# Altium PCB NEpic_small.PcbDoc (part 1 of 2)
Units mil, origin at the board's own origin, x right, y up, seen from the top; angles counter-clockwise.
Board outline 1373 x 1857 mil, 4 copper layers (Top Layer, GND, VCC, Bottom Layer); 29 components, 61 nets, 188 pads, 110 vias.
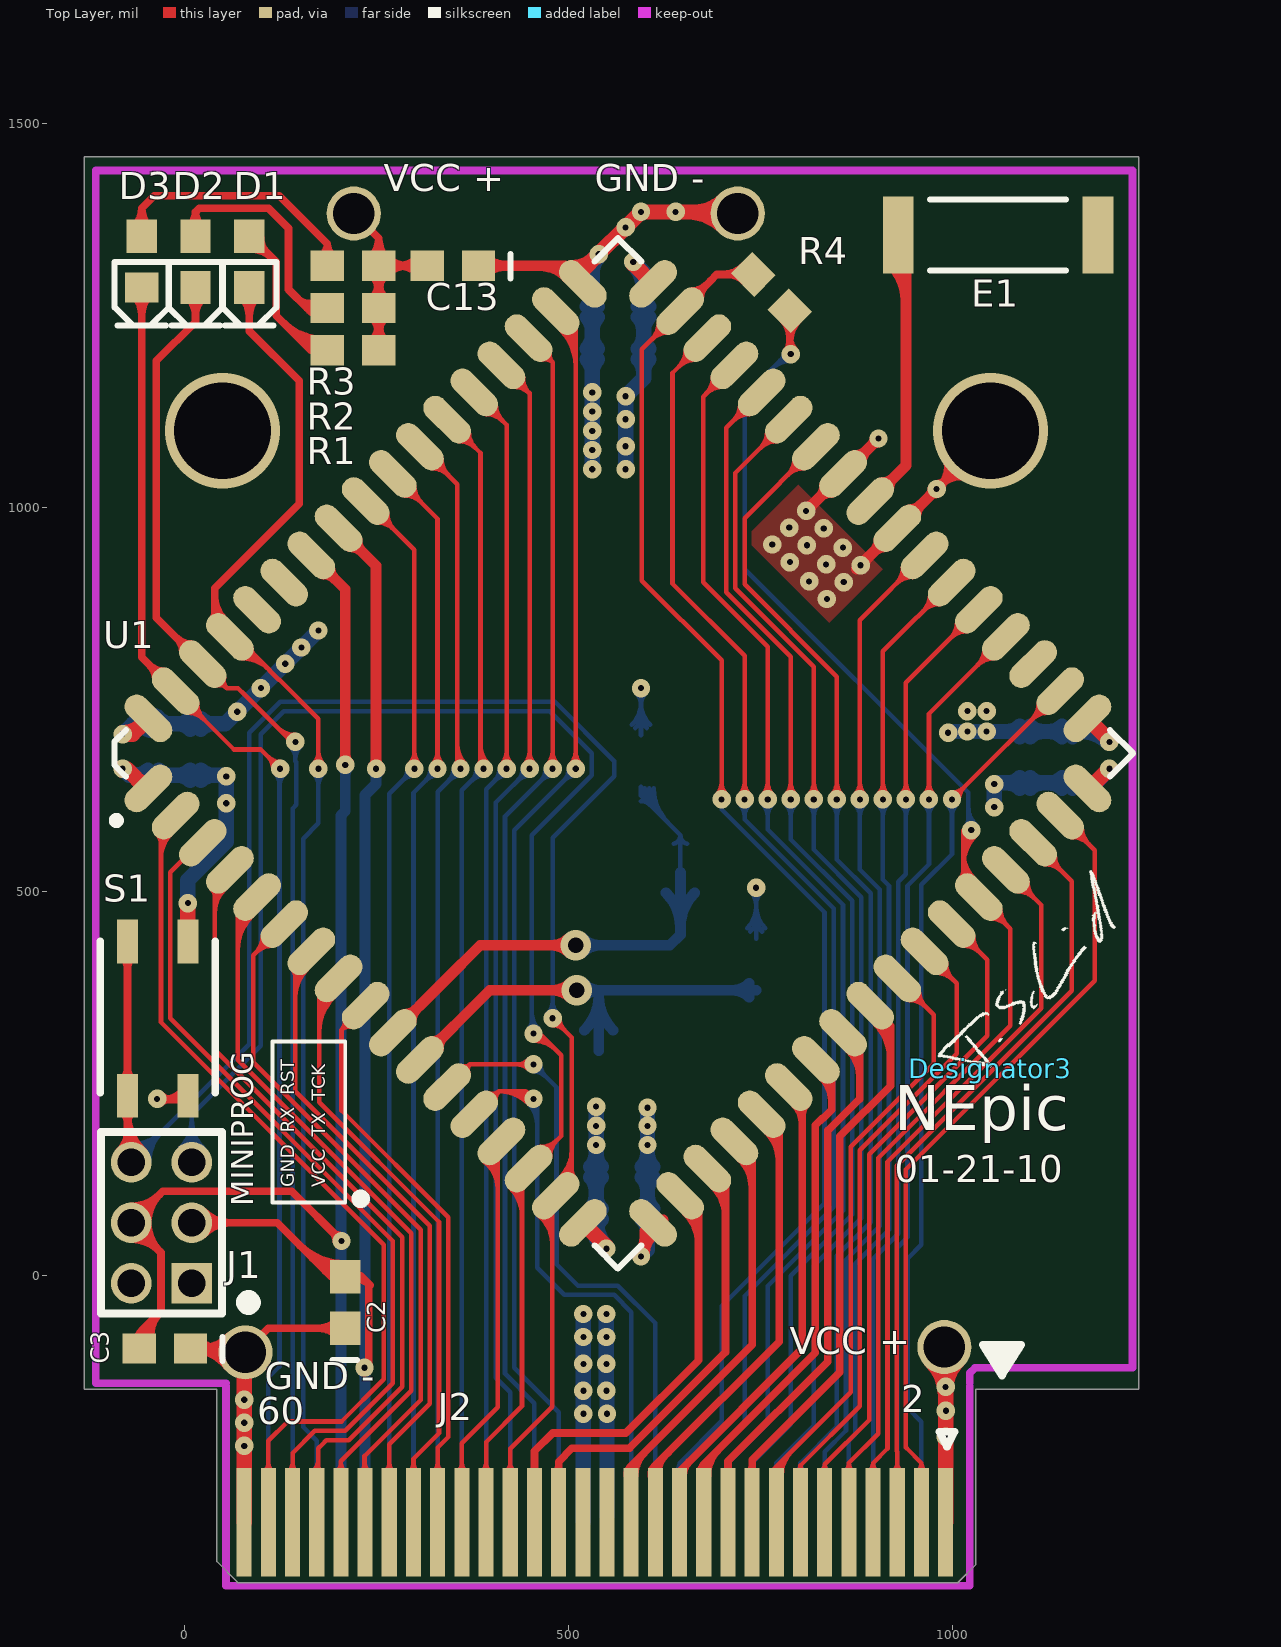
[diagram p0: Top Layer view]
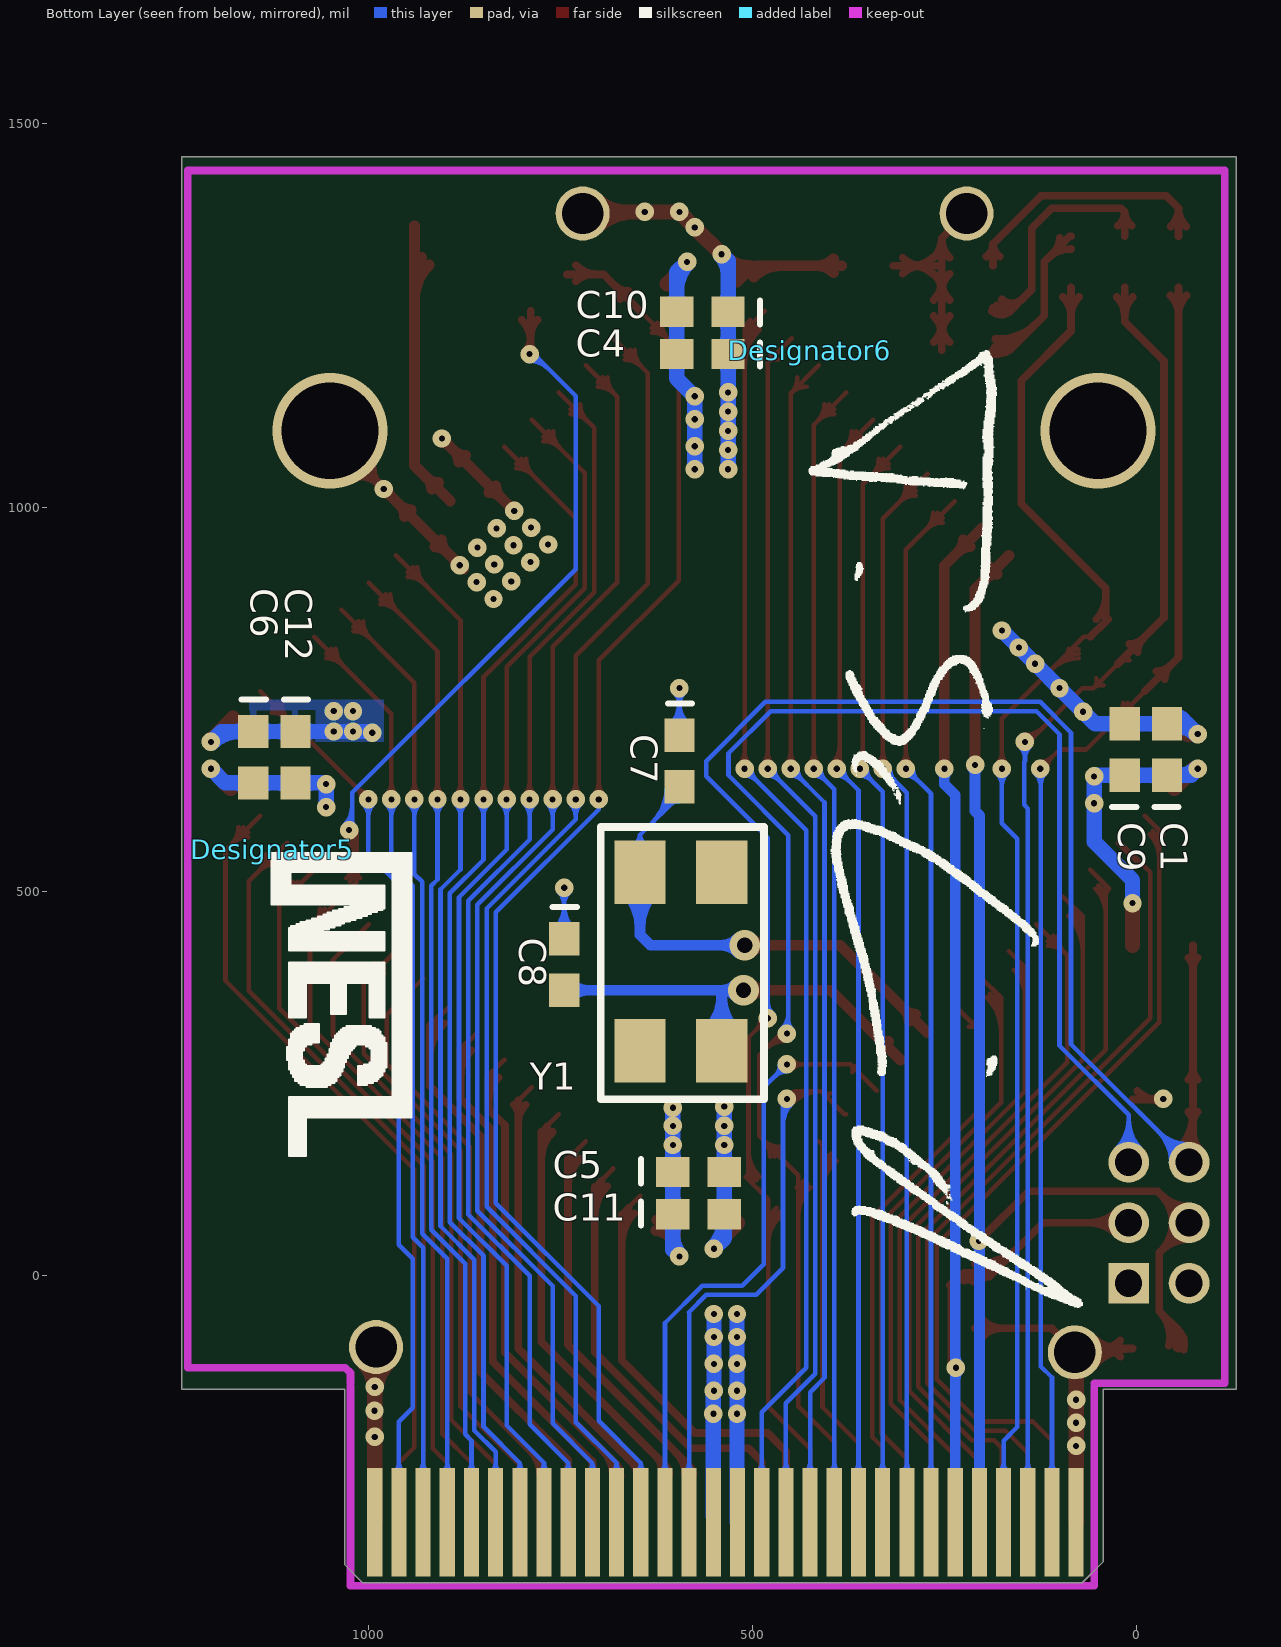
[diagram p1: Bottom Layer view, seen from below]
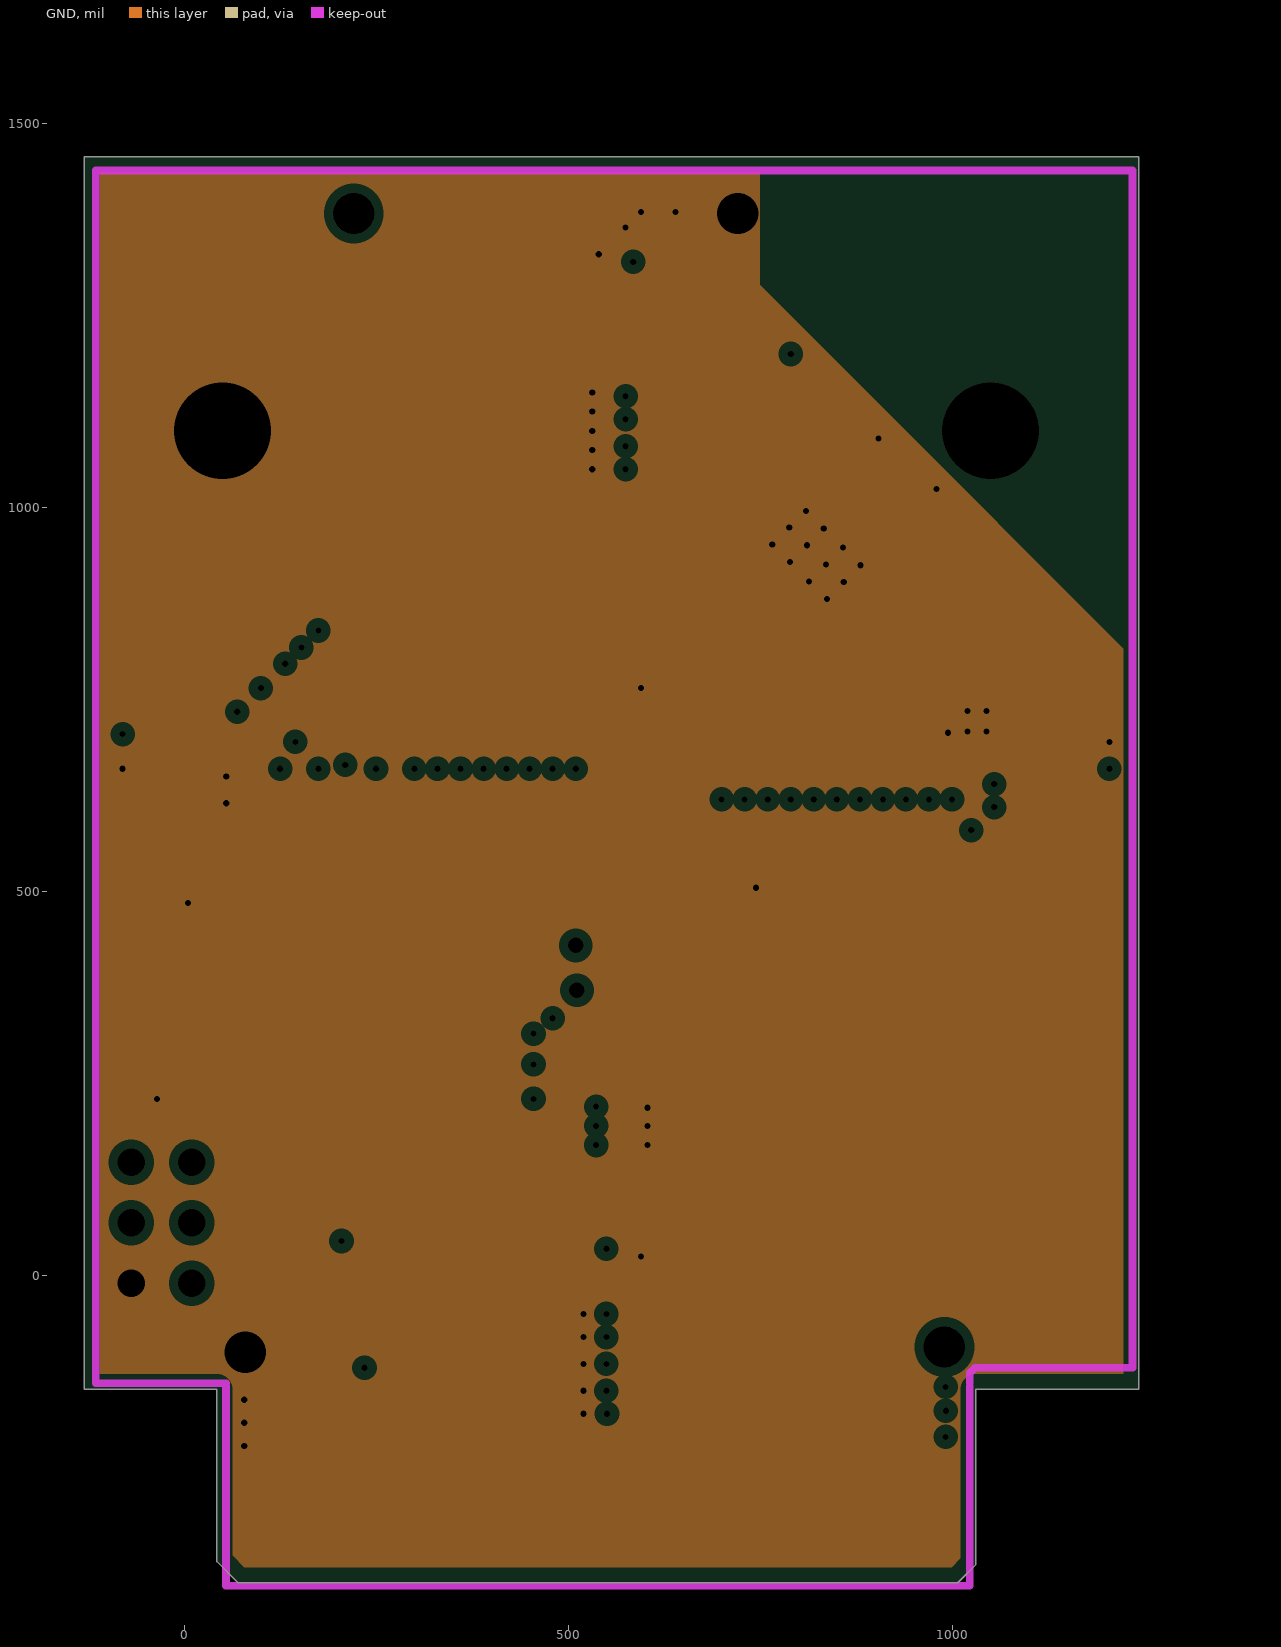
[diagram p2: GND, clearances drawn from the general rule]
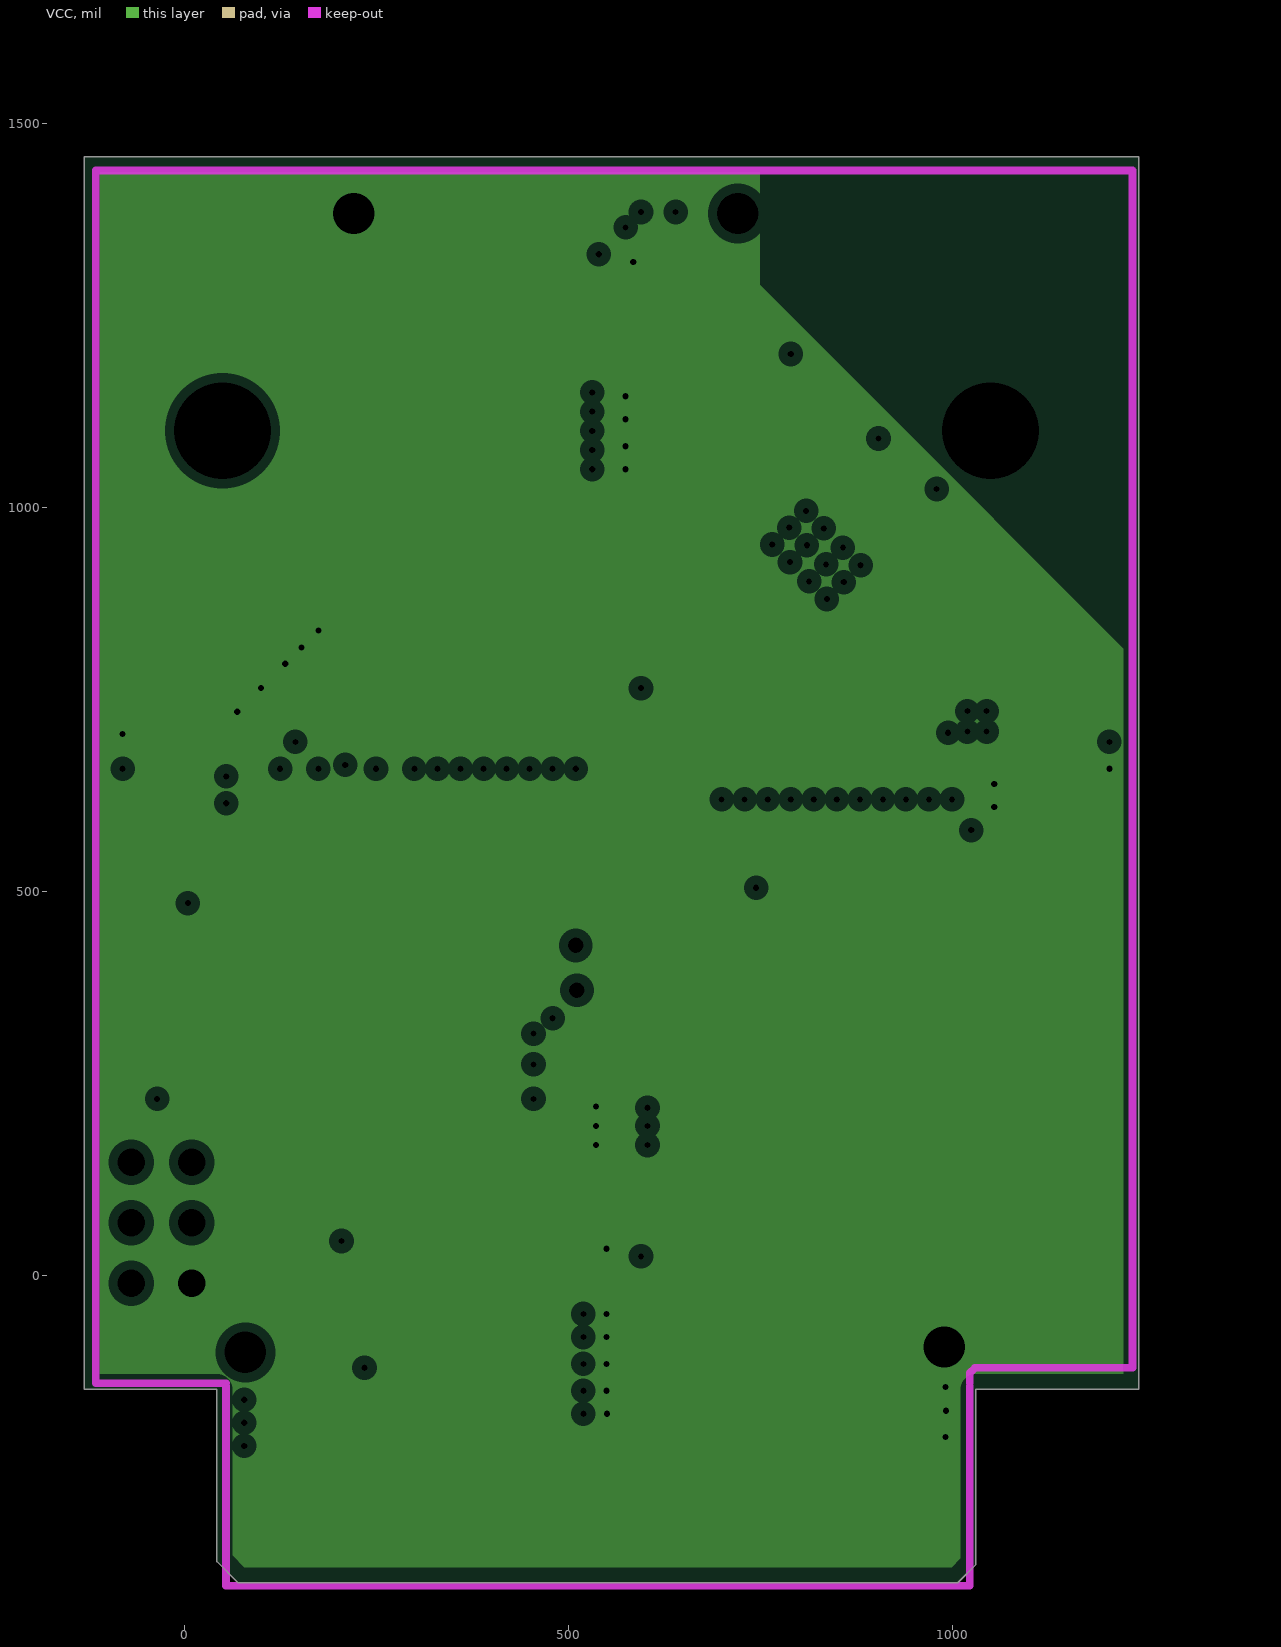
[diagram p3: VCC, clearances drawn from the general rule]

## Layer stack, top to bottom
Top Layer: signal copper 1.4
Dielectric: core 12.6, FR-4, Dk 4.8
GND: plane copper 1.4, net GND
Dielectric: prepreg 12.6, FR-4, Dk 4.8
VCC: plane copper 1.4, net VCC
Dielectric: core 12.6, FR-4, Dk 4.8
Bottom Layer: signal copper 1.4

## Board outline
42.87,-372.44 42.87,-148.03 -130,-148.03 -130,1457 1243,1457 1243,-148.03 1031.06,-148.03 1031.06,-376.38 1007.44,-400 70.43,-400

## Design rules (kind name [scope] priority, off if disabled: settings)
Clearance "Clearance~Sunstone Circuits" [All] p1: gap=6 // Sunstone Circuits Minimum Clearance Rule (MLB~4&6 Layer Designs)
HoleSize "HoleSize~Sunstone Circuits" [All] p1: absolutevalues=TRUE maxlimit=251 minlimit=8 maxpercent=80.000 minpercent=20.000 // Sunstone Circuits Hole Size Rule (MLB~4&6 Layer Designs)
HoleSize Testpoint [All] p2: absolutevalues=TRUE maxlimit=100 minlimit=1 maxpercent=80.000 minpercent=20.000
HoleSize TestPointUsage [All] p3: absolutevalues=TRUE maxlimit=100 minlimit=1 maxpercent=80.000 minpercent=20.000
MinimumAnnularRing "MinimumAnnularRing~Sunstone Circuits" [All] p1: minimumring=7 // Sunstone Circuits Minimum Annular Ring (MLB~4&6 Layer Designs)
PlaneClearance "PlaneClearance~Sunstone Circuits" [All] p1: clearance=12 // Sunstone Circuits Power Plane Clearance Rule (MLB~4&6 Layer Designs)
PlaneConnect [isVia] p1: planeconnectstyle=Direct reliefexpansion=20 reliefentries=4 reliefconductorwidth=10 reliefairgap=10
PlaneConnect "PlaneConnect~Sunstone Circuits" [All] p2: planeconnectstyle=Relief reliefexpansion=10 reliefentries=4 reliefconductorwidth=8 reliefairgap=10 // Sunstone Circuits Power Plane Connect Rule (MLB~4&6 Layer Designs)
PolygonConnect [isVia] p1: connectstyle=Direct reliefconductorwidth=10 reliefentries=4 polygonreliefangle="90 Angle"
PolygonConnect "PolygonConnect~Sunstone Circuits" [All] p2: connectstyle=Relief reliefconductorwidth=8 reliefentries=4 polygonreliefangle="90 Angle" // Sunstone Circuits Polygon Connect Style (MLB~4&6 Layer Designs)
RoutingVias "RoutingVias~Sunstone Circuits" [All] p1: holewidth=8 width=24 viastyle="Through Hole" minholewidth=8 minwidth=24 maxholewidth=20 maxwidth=40 // Sunstone Circuits Routing Vias Rule (MLB~4&6 Layer Designs)
ShortCircuit "ShortCircuit~Sunstone Circuits" [All] p1: allowed=FALSE // Sunstone Circuits Short Circuit Rule~Do Not Allow (MLB~4&6 Layer Designs)
SilkscreenOverComponentPads [All] p1: minsilkscreentomaskgap=10
SolderMaskExpansion "SolderMaskExpansion~Sunstone Circuits" [All] p1: expansion=3 // Sunstone Circuits Solder Mask Expansion Rule (MLB~4&6 Layer Designs)
ViasUnderSMD "ViasUnderSMD~Sunstone Circuits" [All] p1: allowed=FALSE // Sunstone Circuits Vias Under SMD~Do Not Allow (MLB~4&6 Layer Designs)
Width "Width~Sunstone Circuits" [All] p1: maxlimit=100 minlimit=6 preferedwidth=10 // Sunstone Circuits Minimum Width Rule (MLB~4&6 Layer Designs)
23 further rules are at their usual default settings.

## Components (designator, comment, footprint, x,y, rotation, side; value= is the part's Value field where it differs from the comment)
C1 "Cap" CC1608-0603 -40,685 r90 bottom
C2 "Cap" CC1608-0603 210,-35 r90 top
C3 "Cap" CC1608-0603 -25,-95 r180 top
C4 "Cap" CC1608-0603 565,1200 r0 bottom
C5 "Cap" CC1608-0603 570,135 r180 bottom
C6 "Cap" CC1608-0603 1150,675 r270 bottom
C7 "Cap" CC1608-0603 595,670 r270 bottom
C8 "Cap" CC1608-0603 745,405 r270 bottom
C9 "Cap" CC1608-0603 15,685 r90 bottom
C10 "Cap" CC1608-0603 565,1255 r0 bottom
C11 "Cap" CC1608-0603 570,80 r180 bottom
C12 "Cap" CC1608-0603 1095,675 r270 bottom
C13 "Cap" CC1608-0603 350,1315 r180 top
D1 "LITEON/LED RED" LITEON/LED/0603#1 85,1320 r270 top
D2 "LITEON/LED GREEN" LITEON/LED/0603#1 15,1320 r270 top
D3 "LITEON/LED BLUE" LITEON/LED/0603#2 -55,1320 r270 top
Designator3 "Comment" Signature_Thomas_Small 1050,270 r45 top
Designator5 "Comment" NESL_Logo 1125,555 r270 bottom
Designator6 "Comment" Signature_Thomas 425,1205 r270 bottom
E1 "ANT/ATN-2.4" ANT/ANT-2.45-CHPCT-ND 1060,1355 r0 top
J1 "Epic MiniProg" "6-pin 2mm" 10,-10 r90 top
J2 "SAMTEC/MEC8-130" SAMTEC/MEC8L-130-CARD 1035,-400 r180 top locked
R1 "Res3" CR1608-0603 220,1205 r180 top
R2 "Res3" CR1608-0603 220,1260 r180 top
R3 "Res3" CR1608-0603 220,1315 r180 top
R4 "Res3" CR1608-0603 765,1280 r315 top
S1 "PANASONIC/EVQP2" PANASONIC/EVQP2 5,435 r270 top
U1 "Epic Mote Compact" EPIC-Footprint 565,680 r45 top locked
Y1 "CRYSTAL_0" FOX/FQ7050B 540,525 r270 bottom

## Footprints (in the part's own frame and the unit in brackets; to place one, negate y for a bottom-side part, rotate by r counter-clockwise, add the part's x,y. Pads: shape width x height; smd on the part's side, far side on the other; paste and mask are expansions set on the pad)
"6-pin 2mm" [mm] "6-pin 2mm spacing header"
  rect 1.346x1.346 hole 0.9 mask+0: 1(0,0)
  round 1.346 hole 0.9 mask+0: 2(0,2) 3(2,0) 4(2,2) 5(4,0) 6(4,2)
  silkscreen extent -1,-2.04 5,3
ANT/ANT-2.45-CHPCT-ND [mil] "ANT 2.4 GHZ SMD Chip Antenna"
  rect 40x100 smd mask+0: 1(-130,0) ""(130,0)
  silkscreen extent -89,-46 89,46, body extent -128,-43 128,43, height 39
CC1608-0603 [mm] "Chip Capacitor; Body 1.6 x 0.8 mm (LxW typ)"
  rect 1.1x1 smd mask+0: 1(-0.85,0) 2(0.85,0)
  silkscreen extent -1.91,-0.38 -1.91,0.42
CR1608-0603 [mm] "Chip Resistor; Body 1.6 x 0.8 mm (LxW typ)"
  rect 1.1x1 smd mask+0: 1(-0.85,0) 2(0.85,0)
EPIC-Footprint [mm] "LCC, 68-Pins, Body 24.1x24.1mm (max), Pitch 1.27mm, IPC Medium Density"
  oval 1.9x0.8 smd mask+0: 1(-11.8,10.16) 2(-11.8,8.89) 3(-11.8,7.62) 4(-11.8,6.35) 5(-11.8,5.08) 6(-11.8,3.81) 7(-11.8,2.54) 8(-11.8,1.27) 9(-11.8,0) 10(-11.8,-1.27) 11(-11.8,-2.54) 12(-11.8,-3.81) 13(-11.8,-5.08) 14(-11.8,-6.35) 15(-11.8,-7.62) 16(-11.8,-8.89) 17(-11.8,-10.16) 35(11.8,-10.16) 36(11.8,-8.89) 37(11.8,-7.62) 38(11.8,-6.35) 39(11.8,-5.08) 40(11.8,-3.81) 41(11.8,-2.54) 42(11.8,-1.27) 43(11.8,0) 44(11.8,1.27) 45(11.8,2.54) 46(11.8,3.81) 47(11.8,5.08) 48(11.8,6.35) 49(11.8,7.62) 50(11.8,8.89) 51(11.8,10.16)
  oval 0.8x1.9 smd mask+0: 18(-10.16,-11.8) 19(-8.89,-11.8) 20(-7.62,-11.8) 21(-6.35,-11.8) 22(-5.08,-11.8) 23(-3.81,-11.8) 24(-2.54,-11.8) 25(-1.27,-11.8) 26(0,-11.8) 27(1.27,-11.8) 28(2.54,-11.8) 29(3.81,-11.8) 30(5.08,-11.8) 31(6.35,-11.8) 32(7.62,-11.8) 33(8.89,-11.8) 34(10.16,-11.8) 52(10.16,11.8) 53(8.89,11.8) 54(7.62,11.8) 55(6.35,11.8) 56(5.08,11.8) 57(3.81,11.8) 58(2.54,11.8) 59(1.27,11.8) 60(0,11.8) 61(-1.27,11.8) 62(-2.54,11.8) 63(-3.81,11.8) 64(-5.08,11.8) 65(-6.35,11.8) 66(-7.62,11.8) 67(-8.89,11.8) 68(-10.16,11.8)
  silkscreen extent -13.42,-12.05 12.05,12.05, body extent -12.07,-12.07 12.07,12.07, height 2.54
FOX/FQ7050B [mm] "FOX FQ7050B Crystal Oscillaotr Footprint"
  rect 2.1x1.7 smd: 1(0,-2.7) 2(5.9,0) ""(0,0) ""(5.9,-2.7)
  silkscreen extent -1.5,-4 7.5,1.4
LITEON/LED/0603#1 [mm] "Chip LED; 0603; Body 1.6 x 0.8 mm (LxW typ)"
  rect 1.1x1 smd mask+0: 1(-0.85,0) 2(0.85,0)
  silkscreen extent 0,-0.9 2.1,0.9
LITEON/LED/0603#2 [mm] "Chip LED; 0603; Body 1.6 x 0.8 mm (LxW typ)"
  rect 1.1x1 smd mask+0: 1(-0.85,0)
  rect 1x1.1 smd mask+0: 2(0.85,0)
  silkscreen extent 0,-0.9 2.1,0.9
NESL_Logo [mil]
  silkscreen extent 5,-1 400,181
PANASONIC/EVQP2 [mm] "Panasonic EVQP2 SMD Light Touch Switch 4.7mmx3.5mm"
  rect 1.45x0.7 smd mask+0: 1(5.1,0) 2(5.1,-2) 3(0,0) 4(0,-2)
  silkscreen extent 0,-2.9 5,0.9
SAMTEC/MEC8L-130-CARD [mm] "CARD Edge Connector for MEC8L-130, 30 positions, 60 pins"
  rect 0.5x3.6 smd far side: 1(1.1,-2) 3(1.9,-2) 5(2.7,-2) 7(3.5,-2) 9(4.3,-2) 11(5.1,-2) 13(5.9,-2) 15(6.7,-2) 17(7.5,-2) 19(8.3,-2) 21(9.1,-2) 23(9.9,-2) 25(10.7,-2) 27(11.5,-2) 29(12.3,-2) 31(13.1,-2) 33(13.9,-2) 35(14.7,-2) 37(15.5,-2) 39(16.3,-2) 41(17.1,-2) 43(17.9,-2) 45(18.7,-2) 47(19.5,-2) 49(20.3,-2) 51(21.1,-2) 53(21.9,-2) 55(22.7,-2) 57(23.5,-2) 59(24.3,-2)
  rect 0.5x3.6 smd: 2(1.1,-2) 4(1.9,-2) 6(2.7,-2) 8(3.5,-2) 10(4.3,-2) 12(5.1,-2) 14(5.9,-2) 16(6.7,-2) 18(7.5,-2) 20(8.3,-2) 22(9.1,-2) 24(9.9,-2) 26(10.7,-2) 28(11.5,-2) 30(12.3,-2) 32(13.1,-2) 34(13.9,-2) 36(14.7,-2) 38(15.5,-2) 40(16.3,-2) 42(17.1,-2) 44(17.9,-2) 46(18.7,-2) 48(19.5,-2) 50(20.3,-2) 52(21.1,-2) 54(21.9,-2) 56(22.7,-2) 58(23.5,-2) 60(24.3,-2)
  Keep-Out Layer lines w0.254: 24.9,-6.5 24.9,0.1 0.3,0.1 0.3,-6.5
  silkscreen extent 0.8,-5 1.3,-4.5
Signature_Thomas [mil] "My Signature"
  silkscreen extent 0,-1 1247,355
Signature_Thomas_Small [mil] "smaller signature"
  silkscreen extent -37,1 276,90

## Part data
C1 C2 C3 C4 C5 C6 C7 C8 C9 C10 C11 C12 C13: "Capacitor (Semiconductor SIM Model)"
D1: "LiteOn Red LED 0605 Footprint"
D2: "LiteOn Green LED 0605 Footprint"
D3: "LiteOn Blue LED 0605 Footprint"
E1: library part Antenna, "ANT/ANT-2.4 Chip Antenna"
J2: library part SAMTEC/HSEC8/50, "0.8mm Pitch 60 pin Card Edge Socket"
R1 R2 R3 R4: "Resistor"

## Free pads (board coordinates)
  round 70.5 hole 54: 0(80,-100) 0(221,1383) 0(721,1383) 0(990,-93)

## Via types
v1: diameter 24, hole 8, Top Layer to Bottom Layer, tented both sides, 106 vias
v2: diameter 40, hole 20, Top Layer to Bottom Layer, tented both sides, 2 vias
v3: diameter 150, hole 126, Top Layer to Bottom Layer, tented both sides, 2 vias

## Nets (pads, with @x,y where several pads share a name; then routed paths per layer and width w, separated by ;. In a path a pad name is that pad's centre, name@x,y a point inside that pad or via, vN(x,y) a via of type N, cw(c..) or ccw(c..) an arc to the next point about the centre after c; other vN are vias at no path point)
ADC0: J2.36 U1.19 | length 666.1
  Top Layer w6: U1.19@646.01,104.01 U1.19@670,80.03
  Top Layer w10: J2.36@452.84,-256.81 ccw(c444.57,-248.55) 456.26,-248.55 ccw(c467.95,-248.55) J2.36@459.68,-256.81 ; J2.36@456.26,-321.26 456.26,-228.74 480,-205 575,-205 670,-110 U1.19@670,80.03 ; U1.19@653.72,81.1 cw(c614.43,41.81) 670,41.81 ; U1.19@660.79,88.17 cw(c638.57,65.95) 670,65.95
ADC1: J2.34 U1.20 | length 689.1
  Top Layer w6: U1.20@681.37,139.37 U1.20@705,115.74
  Top Layer w10: J2.34@484.33,-256.81 ccw(c476.07,-248.55) 487.76,-248.55 ccw(c499.45,-248.55) J2.34@491.18,-256.81 ; J2.34@487.76,-321.26 487.76,-242.24 505,-225 580,-225 705,-100 U1.20@705,115.74 ; U1.20@689.08,116.46 cw(c650.64,78.02) 705,78.02 ; U1.20@696.15,123.53 cw(c674.78,102.16) 705,102.16
ADC2: J2.28 U1.21 | length 700.6
  Top Layer w6: U1.21@716.72,174.72 U1.21@740,151.45
  Top Layer w10: J2.28@577.09,-260.24 cw(c594.77,-260.24) 582.26,-247.74 ; J2.28@578.82,-256.81 ccw(c570.55,-248.55) 582.24,-248.55 ccw(c593.93,-248.55) J2.28@585.67,-256.81 ; J2.28@582.24,-321.26 582.24,-247.76 ; J2.28@587.09,-260.24 cw(c628.91,-260.24) 599.34,-230.66 ; U1.21@724.43,151.81 cw(c686.85,114.23) 740,114.23 ; U1.21@731.5,158.88 cw(c710.99,138.37) 740,138.37 ; U1.21@740,151.45 740,-90 582.24,-247.76
ADC3: J2.26 U1.22 | length 736.2
  Top Layer w6: U1.22@752.08,210.08 U1.22@775,187.16
  Top Layer w10: J2.26@608.7,-261.33 cw(c622.43,-258.35) 612.5,-248.42 ; J2.26@610.32,-256.81 ccw(c602.05,-248.55) 613.74,-248.55 ccw(c625.43,-248.55) J2.26@617.16,-256.81 ; J2.26@613.74,-321.26 613.74,-247.17 625.46,-235.46 ; J2.26@618.47,-259.21 cw(c643.73,-253.73) 625.45,-235.46 ; 630.91,-230 625.46,-235.46 ; U1.22@759.79,187.17 cw(c723.07,150.45) 775,150.45 ; U1.22@766.86,194.24 cw(c747.21,174.59) 775,174.59 ; U1.22@775,187.16 775,-85.91 625.46,-235.46
ADC4: J2.24 U1.23 | length 700.5
  Top Layer w6: J2.24@645.24,-321.26 J2.24@645.24,-254.76 ; U1.23@787.43,245.44 U1.23@805,227.87
  Top Layer w10: J2.24@645.24,-254.76 805,-95 U1.23@805,227.87 ; J2.24@650.08,-260.24 cw(c674.98,-260.24) 657.37,-242.63 ; U1.23@795.14,222.52 cw(c771.35,198.73) 805,198.73 ; 805,209.62 cw(c823.24,209.62) U1.23@810.34,222.52
ADC5: J2.22 U1.24 | length 803.1
  Top Layer w6: U1.24@822.79,280.79 U1.24@843.49,260.09
  Top Layer w10: J2.22@671.57,-260.24 cw(c693.75,-260.24) 678.07,-244.56 ; J2.22@673.31,-256.81 ccw(c665.04,-248.55) 676.73,-248.55 ccw(c688.42,-248.55) J2.22@680.16,-256.81 ; J2.22@676.73,-321.26 676.73,-245.9 822,-100.63 822,195.63 831.37,205 832.37,205 843.49,216.11 U1.24@843.49,260.09 ; J2.22@681.57,-260.24 cw(c727.89,-260.24) 695.14,-227.49 ; U1.24@830.5,257.88 cw(c799.15,226.53) 843.49,226.53 ; U1.24@837.57,264.95 cw(c823.29,250.67) 843.49,250.67
ADC6/DAC0: J2.20 U1.25 | length 793.5
  Top Layer w6: 838,189 839,189 ; U1.25@858.14,316.15 U1.25@880,294.29
  Top Layer w10: J2.20@704.8,-256.81 ccw(c696.54,-248.55) 708.23,-248.55 ccw(c719.92,-248.55) J2.20@711.65,-256.81 ; J2.20@708.23,-321.26 708.23,-241.77 838,-112 838,-83.37 838,189 ; 839,189 880,230 880,240 U1.25@880,294.29 ; U1.25@865.86,293.23 cw(c831.71,259.09) 880,259.09 ; U1.25@872.93,300.31 cw(c855.85,283.23) 880,283.23
ADC7/DAC1: J2.18 U1.26 | length 867.9
  Top Layer w6: U1.26@893.5,351.5 920,325 ; U1.26@915.7,325.46 cw(c917.56,322.56) 920,325 ; U1.26@919.54,329.3 ccw(c922.44,327.44) 920,325
  Top Layer w10: J2.18@736.3,-256.81 ccw(c728.03,-248.55) 739.72,-248.55 ccw(c751.42,-248.55) J2.18@743.15,-256.81 ; J2.18@739.72,-321.26 739.72,-240 749.72,-230 854,-125.72 854,-76.75 854,181.37 920,247.37 920,325 ; U1.26@901.21,328.59 cw(c855.84,283.23) 920,283.23 ; U1.26@908.28,335.66 cw(c879.99,307.37) 920,307.37
ATEST1: J2.15 U1.46 | length 1745.9
  Top Layer w6: U1.46@759.37,1099.25 cw(c728.6,1099.25) 750.36,1077.49 cw(c772.12,1055.73) U1.46@772.12,1086.5 ; U1.46@765.37,1099.25 cw(c749.08,1099.25) 760.6,1087.73 cw(c772.12,1076.21) U1.46@772.12,1092.5 ; U1.46@787.43,1114.56 718,1045.13 718,895.03 820,793.03 v1(820,620) ; v1@813.64,626.36 ccw(c798.27,641.73) 820,641.73 ccw(c841.73,641.73) v1@826.36,626.36
  Bottom Layer w6: J2.15@766.44,-255.34 ccw(c755.38,-244) 771.22,-244 ; J2.15@771.22,-321.26 771.22,-244 ; J2.15@776,-255.34 cw(c787.06,-244) 771.22,-244 ; v1@813.64,613.64 cw(c798.27,598.27) 820,598.27 cw(c841.73,598.27) v1@826.36,613.64 ; v1(820,620) 820,554.85 882,492.85 882,74.55 820,12.55 820,-195.22 771.22,-244
ATEST2: J2.17 U1.47 | length 1779.6
  Top Layer w6: U1.47@724.02,1134.61 cw(c693.24,1134.61) 715,1112.85 cw(c736.77,1091.08) U1.47@736.77,1121.86 ; U1.47@730.02,1134.61 cw(c713.73,1134.61) 725.25,1123.09 cw(c736.77,1111.57) U1.47@736.77,1127.86 ; U1.47@752.08,1149.92 706,1103.84 706,890.06 790,806.06 v1(790,620) ; v1@783.64,626.36 ccw(c768.27,641.73) 790,641.73 ccw(c811.73,641.73) v1@796.36,626.36
  Bottom Layer w6: J2.17@734.95,-255.34 ccw(c723.88,-244) 739.72,-244 ; J2.17@739.72,-321.26 739.72,-244 ; J2.17@744.5,-255.34 cw(c755.56,-244) 739.72,-244 ; v1@783.64,613.64 cw(c768.27,598.27) 790,598.27 cw(c811.73,598.27) v1@796.36,613.64 ; v1(790,620) 790,567.88 870,487.88 870,79.52 790,-0.48 790,-193.72 739.72,-244
FLASH_CS: J2.3 U1.36 | length 1340.4
  Top Layer w6: v1(1000,620) U1.36@1140.99,761.01 ; v1@1000,629 ccw(c1000,650.67) 1015.32,635.35 ; v1@1009,620 cw(c1030.79,620) 1015.38,635.41 ; U1.36@1112.93,745.7 cw(c1082.15,745.7) 1103.91,723.94 cw(c1125.67,702.18) U1.36@1125.67,732.95 ; U1.36@1118.93,745.7 cw(c1102.64,745.7) 1114.16,734.18 cw(c1125.67,722.66) U1.36@1125.67,738.95
  Bottom Layer w6: J2.3@955.36,-255.4 ccw(c943.68,-243.72) 960.2,-243.72 ccw(c976.72,-243.72) J2.3@965.04,-255.4 ; J2.3@960.2,-321.26 960.2,-190.2 942,-172 942,21.8 960.2,40 960.2,508.99 964,512.79 1000,548.79 v1(1000,620) ; v1@993.64,613.64 cw(c978.27,598.27) 1000,598.27 cw(c1021.73,598.27) v1@1006.36,613.64
FLASH_WP: U1.37
GND: C1.1 C2.1 C3.1 C4.1 C5.1 C6.1 C7.1 C8.1 C9.1 C10.1 C11.1 C12.1 C13.1 J1.2 J2.31 J2.60 pad.0@80,-100 pad.0@721,1383 S1.1 S1.3 U1.1 U1.18 U1.35 U1.42 U1.44 U1.52 | length 4954.2
  Top Layer w6: U1.35@1176.34,725.66 U1.35@1176.34,726.34
  Top Layer w10: v1(-80,660) v1@-75,660 ; U1.1@-49.34,634.34 U1.1@-46.34,634.34 ; v1(-35,230) -34.21,229.21 S1.1@5,229.21 ; v1@-30.05,225.05 cw(c-20,215) -20,229.21 ; v1@-30.05,234.95 ccw(c-16.2,248.8) -16.2,229.21 ; v1@-28.27,229.21 ccw(c-28.27,267.48) S1.1@-1.21,240.42 ; C3.1@19.04,-95 ccw(c19.04,-39.04) pad.0@58.61,-78.61 ; C3.1@20.82,-105.38 cw(c45.89,-130.45) 45.89,-95 cw(c45.89,-59.55) C3.1@20.82,-84.62 ; C3.1@26.28,-95 cw(c26.28,-144.52) pad.0@64.41,-112.92 ; 43.18,-95 ccw(c43.18,-63.18) pad.0@65.68,-85.68 ; pad.0@56.71,-119.3 ccw(c5,-162.16) 5,-95 73.31,-95 78.31,-100 109.84,-68.46 C2.1@210,-68.46 ; C2.1@199.62,-78.85 ccw(c174.55,-103.92) 174.55,-68.46 ccw(c174.55,-33.01) C2.1@199.62,-58.08 ; U1.52@495.69,1315 U1.52@519.34,1291.34 U1.52@519.34,1309.34 ; pad.0@719,1385 pad.0@721,1383 ; v1(980,1024.29) 1050,1094.29 v3@1050,1104 ; v1@980,1031.29 ccw(c980,1048.19) 991.95,1036.24 ccw(c1003.9,1024.29) v1@987,1024.29 ; v3@989.78,1068.31 cw(c962.11,1051.9) 984.86,1029.15 cw(c1012.56,1001.45) v3@1025.99,1038.25 ; 993.96,1038.25 ccw(c973.54,1058.68) v3@998.39,1073.41 ; 995.94,1040.23 cw(c1018.49,1017.69) v3@1029.42,1047.64 ; v1(1205,695) v1@1205,697
  Top Layer w14: C13.1@383.46,1315 U1.52@495.69,1315 ; C13.1@394.4,1306.03 cw(c416.06,1284.38) 416.06,1315 cw(c416.06,1345.62) C13.1@394.4,1323.97 ; 462.76,1315 cw(c462.76,1265.38) U1.52@497.85,1300.47 ; v1@591.46,28.54 ccw(c570.86,49.14) 600,49.14 ; v1(595,25) 600,25 600,58 U1.18@610.66,68.66 ; v1@600,30.41 cw(c628.31,30.41) U1.18@625.43,58.57 ; 600,45.91 cw(c626.73,45.91) U1.18@624.01,72.5 ; U1.18@605.98,68.66 U1.18@610.66,68.66 ; U1.18@613.67,68.66 611.34,68.66 U1.18@610.66,68.66 ; v1(810,995.71) U1.44@858.14,1043.85 v1(904.29,1090) ; v1@810,1000.71 ccw(c810,1012.78) 818.54,1004.25 ccw(c827.07,995.71) v1@815,995.71 ; U1.44@834.08,1028.54 cw(c812.97,1028.54) 827.9,1013.61 cw(c842.83,998.68) U1.44@842.83,1019.79 ; U1.44@873.46,1067.91 ccw(c873.46,1089.03) 888.39,1074.1 ccw(c903.32,1059.17) U1.44@882.2,1059.17 ; v1@875.71,920 U1.42@928.85,973.14 v1(980,1024.29) ; v1@886,925 cw(c898.77,925) 889.74,934.03 ; v1@899.29,1090 cw(c887.22,1090) 895.75,1081.46 cw(c904.29,1072.93) v1@904.29,1085 ; U1.42@904.79,957.83 cw(c883.68,957.83) 898.61,942.9 cw(c913.54,927.97) U1.42@913.54,949.08 ; U1.42@944.17,997.2 ccw(c944.17,1018.32) 959.1,1003.39 ccw(c974.03,988.46) U1.42@952.91,988.46 ; v1@975,1024.29 cw(c962.93,1024.29) 971.46,1015.75 cw(c980,1007.22) v1@980,1019.29
  Top Layer w20: v1@-80,658 cw(c-80,641.1) -68.05,653.05 ; v1@-75,660 U1.1@-49.34,634.34 ; -61.28,646.28 ccw(c-46.34,661.22) U1.1@-46.34,640.09 ; S1.3@5,430 v1(5,485) ; J2.60@78.31,-321.26 v1(78.31,-221.69) v1(78.31,-191.69) v1(78.31,-161.69) pad.0@78.31,-100 ; U1.52@504.03,1312.4 ccw(c504.03,1356.75) v1@535.39,1325.39 ; U1.52@519.34,1309.34 v1(540,1330) v1(575,1365) v1(595,1385) v1(640,1385) pad.0@719,1385 ; 655.21,1385 cw(c655.21,1317.21) pad.0@703.15,1365.15 ; 664.87,1385 ccw(c664.87,1439.13) pad.0@703.15,1400.85 ; U1.35@1176.34,725.66 v1@1205,697
  Bottom Layer w6: C7.1@583.2,717.23 ccw(c554.72,745.71) 595,745.71 ccw(c635.28,745.71) C7.1@606.8,717.23 ; C7.1@587.44,712.99 ccw(c569.2,731.23) 595,731.23 ccw(c620.8,731.23) C7.1@602.56,712.99 ; v1@588.64,758.64 cw(c573.27,743.27) 595,743.27 cw(c616.73,743.27) v1@601.36,758.64 ; C7.1@595,703.46 v1(595,765) ; C8.1@733.2,452.23 ccw(c704.72,480.71) 745,480.71 ccw(c785.28,480.71) C8.1@756.8,452.23 ; C8.1@737.44,447.99 ccw(c719.2,466.23) 745,466.23 ccw(c770.8,466.23) C8.1@752.56,447.99 ; v1@738.64,498.64 cw(c723.27,483.27) 745,483.27 cw(c766.73,483.27) v1@751.36,498.64 ; C8.1@745,438.46 v1(745,505)
  Bottom Layer w10: v1(995,706.93) v1@996.54,708.46
  Bottom Layer w14: J2.31@519.25,-321.26 J2.31@520,-320.51 ; v1(595,25) v1@603.46,33.46
  Bottom Layer w20: v1(-80,660) -71.54,651.54 C9.1@15,651.54 53.46,651.54 v1(55,650) v1(55,615) 55,565 5,515 v1(5,485) ; v1@-78.59,661.41 ccw(c-54.74,685.26) C1.1@-54.74,651.54 ; C1.1@-46.85,644.69 ccw(c-63.38,628.15) -63.38,651.54 ccw(c-63.38,674.92) C1.1@-46.85,658.38 ; C1.1@-33.15,644.69 cw(c-16.62,628.15) -16.62,651.54 cw(c-16.62,674.92) C1.1@-33.15,658.38 ; C9.1@8.15,644.69 ccw(c-8.38,628.15) -8.38,651.54 ccw(c-8.38,674.92) C9.1@8.15,658.38 ; C9.1@21.85,644.69 cw(c38.38,628.15) 38.38,651.54 cw(c38.38,674.92) C9.1@21.85,658.38 ; J2.31@520,-320.51 v1(520,-50) ; C4.1@524.69,1193.15 cw(c508.15,1176.62) 531.54,1176.62 cw(c554.92,1176.62) C4.1@538.38,1193.15 ; C4.1@524.69,1206.85 ccw(c508.15,1223.38) 531.54,1223.38 ccw(c554.92,1223.38) C4.1@538.38,1206.85 ; C10.1@524.69,1248.15 cw(c508.15,1231.62) 531.54,1231.62 cw(c554.92,1231.62) C10.1@538.38,1248.15 ; C10.1@524.69,1261.85 ccw(c508.15,1278.38) 531.54,1278.38 ccw(c554.92,1278.38) C10.1@538.38,1261.85 ; v1(531.54,1050) 531.54,1321.54 v1(540,1330) ; 531.54,1304.74 cw(c565.26,1304.74) v1@541.41,1328.59 ; v1@593.59,26.41 ccw(c569.74,50.26) 603.46,50.26 ; C11.1@596.62,73.15 cw(c580.08,56.62) 603.46,56.62 cw(c626.85,56.62) C11.1@610.31,73.15 ; C11.1@596.62,86.85 ccw(c580.08,103.38) 603.46,103.38 ccw(c626.85,103.38) C11.1@610.31,86.85 ; C5.1@596.62,128.15 cw(c580.08,111.62) 603.46,111.62 cw(c626.85,111.62) C5.1@610.31,128.15 ; C5.1@596.62,141.85 ccw(c580.08,158.38) 603.46,158.38 ccw(c626.85,158.38) C5.1@610.31,141.85 ; v1@603.46,33.46 C5.1@603.46,135 v1(603.46,218.46) ; v1@996.54,708.46 C12.1@1095,708.46 C6.1@1150,708.46 1191.54,708.46 v1(1205,695) ; C12.1@1088.15,701.62 ccw(c1071.62,685.08) 1071.62,708.46 ccw(c1071.62,731.85) C12.1@1088.15,715.31 ; C12.1@1101.85,701.62 cw(c1118.38,685.08) 1118.38,708.46 cw(c1118.38,731.85) C12.1@1101.85,715.31 ; C6.1@1143.15,701.62 ccw(c1126.62,685.08) 1126.62,708.46 ccw(c1126.62,731.85) C6.1@1143.15,715.31 ; C6.1@1156.85,701.62 cw(c1173.38,685.08) 1173.38,708.46 cw(c1173.38,731.85) C6.1@1156.85,715.31 ; C6.1@1167.67,708.46 cw(c1167.67,657.67) v1@1203.59,693.59
  other v1: 520,-180 520,-150 520,-115 520,-80 603.46,170 603.46,195 1020,708.46 1045,708.46 1020,735 1045,735 837,881 859,903 814,904 881,925 836,926 789,929 858,948 811,951 766,952 833,973 788,974 531.54,1075 531.54,1100 531.54,1125 531.54,1150
  other v3: 50,1100 1050,1100
I2C0/SPI0: J2.33 U1.53 | length 1882.5
  Top Layer w6: U1.53@483.99,1255.99 510,1229.98 510,1110 v1(510,660) ; U1.53@490.29,1231.66 cw(c442.7,1184.07) 510,1184.07 ; U1.53@494.53,1235.9 cw(c457.18,1198.55) 510,1198.55 ; U1.53@498.77,1240.15 cw(c471.67,1213.04) 510,1213.04 ; U1.53@503.02,1244.39 cw(c486.15,1227.53) 510,1227.53 ; v1@503.64,666.36 ccw(c488.27,681.73) 510,681.73 ccw(c531.73,681.73) v1@516.36,666.36
  Bottom Layer w6: J2.33@482.92,-255.4 ccw(c471.24,-243.72) 487.76,-243.72 ccw(c504.28,-243.72) J2.33@492.59,-255.4 ; J2.33@487.76,-321.26 487.76,-177.76 430,-120 430,37.7 430,580 v1(510,660) ; v1@501,660 cw(c479.27,660) 494.64,644.64 cw(c510,629.27) v1@510,651
LED1: D1.2 J2.53 U1.65 | length 2043.2
  Top Layer w6: U1.65@59.72,831.72 68.28,831.72 110.76,789.24 110.76,788.07 123.07,775.76 124.24,775.76 175,725 v1(175,660) ; U1.65@75.04,803.66 cw(c75.04,752.24) 111.4,788.6 ; U1.65@75.04,809.66 cw(c75.04,772.72) 101.16,798.84 ; U1.65@75.04,815.66 cw(c75.04,793.21) 90.91,809.09 ; U1.65@87.78,816.41 ccw(c97.91,816.41) 90.75,809.25 ; v1@168.64,666.36 ccw(c153.27,681.73) 175,681.73 ccw(c196.73,681.73) v1@181.36,666.36
  Top Layer w10: U1.65@36.81,854.63 ccw(c29.12,862.33) 40,862.33 ; 40,883.63 ccw(c81.01,883.63) U1.65@52.01,854.63 ; U1.65@59.72,831.72 40,851.45 40,895 150,1005 150,1165 85,1230 D1.2@85,1286.54 ; D1.2@74.62,1274.18 cw(c49.55,1249.11) 85,1249.11 cw(c120.45,1249.11) D1.2@95.38,1274.18
  Bottom Layer w6: J2.53@167.96,-255.4 ccw(c156.28,-243.72) 172.8,-243.72 ccw(c189.31,-243.72) J2.53@177.63,-255.4 ; v1@168.64,653.64 cw(c153.27,638.27) 175,638.27 cw(c196.73,638.27) v1@181.36,653.64 ; J2.53@172.8,-321.26 172.8,-214.95 155,-197.15 155,568.94 175,588.94 v1(175,660)
LED2: D2.2 J2.55 U1.66 | length 1968.5
  Top Layer w6: U1.66@8.93,801.07 19.67,801.07 U1.66@24.37,796.37 55.74,765 ; U1.66@42.68,768.67 cw(c45.95,755.21) 55.74,765 ; U1.66@52.07,778.05 ccw(c65.52,774.79) 55.74,765 ; 121.62,713.69 ccw(c145,737.07) v1@145,704 ; 131.86,703.44 ccw(c145,716.59) v1@145,698 ; 132.96,702.34 cw(c125.61,695) v1@136,695 ; v1(145,695) 140.3,695 79,756.3 70.3,765 55.74,765
  Top Layer w10: U1.66@-1.69,811.68 ccw(c-27.64,811.68) -9.29,830.03 ccw(c9.06,848.37) U1.66@9.06,822.43 ; D2.2@4.62,1274.18 cw(c-20.45,1249.11) 15,1249.11 cw(c50.45,1249.11) D2.2@25.38,1274.18 ; D2.2@15,1286.54 15,1242 -36,1191 -36,856.74 U1.66@24.37,796.37
  Bottom Layer w6: J2.55@136.46,-255.4 ccw(c124.78,-243.72) 141.3,-243.72 ccw(c157.82,-243.72) J2.55@146.14,-255.4 ; v1@138.64,688.64 cw(c123.27,673.27) 145,673.27 cw(c166.73,673.27) v1@151.36,688.64 ; J2.55@141.3,-321.26 141.3,608.27 146,612.97 146,668.7 145,669.7 v1(145,695)
LED3: D3.2 J2.57 U1.67 | length 1973.7
  Top Layer w6: U1.67@-10.99,761.01 65.02,685 100,685 v1(125,660) ; U1.67@4.33,732.95 cw(c4.33,702.17) 26.09,723.94 cw(c47.85,745.7) U1.67@17.07,745.7 ; U1.67@4.33,738.95 cw(c4.33,722.66) 15.84,734.18 cw(c27.36,745.7) U1.67@11.07,745.7 ; v1@116,660 ccw(c94.27,660) 109.64,675.36 ccw(c125,690.73) v1@125,669
  Top Layer w10: D3.2@-65.38,1276.15 cw(c-90.45,1251.08) -55,1251.08 cw(c-19.55,1251.08) D3.2@-44.62,1276.15 ; D3.2@-55,1286.54 -55,805.02 U1.67@-10.99,761.01 ; U1.67@-37.05,776.32 ccw(c-62.99,776.32) -44.65,794.67 ccw(c-26.3,813.02) U1.67@-26.3,787.07
  Bottom Layer w6: J2.57@104.96,-255.4 ccw(c93.28,-243.72) 109.8,-243.72 ccw(c126.32,-243.72) J2.57@114.64,-255.4 ; J2.57@109.8,-321.26 109.8,-132.78 124.25,-118.33 124.25,659.25 v1(125,660) ; v1@118.64,653.64 cw(c105.08,640.08) 124.25,640.08 ; 124.25,636.46 cw(c148.54,636.46) v1@131.36,653.64
MISO0: J2.41 U1.57 | length 1651.7
  Top Layer w6: U1.57@342.57,1114.56 386,1071.13 386,664 v1(390,660) ; U1.57@357.88,1086.5 cw(c357.88,1055.73) 379.64,1077.49 cw(c401.4,1099.25) U1.57@370.63,1099.25 ; U1.57@357.88,1092.5 cw(c357.88,1076.21) 369.4,1087.73 cw(c380.92,1099.25) U1.57@364.63,1099.25 ; v1@383.64,666.36 ccw(c377.93,672.07) 386,672.07 ; 386,676.9 ccw(c406.9,676.9) v1@392.12,662.12 ; 386,691.38 ccw(c421.38,691.38) v1@396.36,666.36
  Bottom Layer w6: J2.41@356.93,-255.4 ccw(c345.25,-243.72) 361.77,-243.72 ccw(c378.29,-243.72) J2.41@366.61,-255.4 ; J2.41@361.77,-321.26 361.77,631.77 v1(390,660) ; v1@381,660 cw(c359.27,660) 374.64,644.64 cw(c390,629.27) v1@390,651
MOSI0/SDA: J2.39 U1.56 | length 1667.8
  Top Layer w6: U1.56@377.92,1149.92 418.92,1108.92 420,1107.84 v1(420,660) ; U1.56@393.23,1121.86 cw(c393.23,1091.08) 415,1112.85 cw(c436.76,1134.61) U1.56@405.98,1134.61 ; U1.56@393.23,1127.86 cw(c393.23,1111.57) 404.75,1123.09 cw(c416.27,1134.61) U1.56@399.98,1134.61 ; v1@413.64,666.36 ccw(c398.27,681.73) 420,681.73 ccw(c441.73,681.73) v1@426.36,666.36
  Bottom Layer w6: J2.39@388.43,-255.4 ccw(c376.75,-243.72) 393.27,-243.72 ccw(c409.79,-243.72) J2.39@398.11,-255.4 ; J2.39@393.27,-321.26 393.27,633.27 v1(420,660) ; v1@411,660 cw(c389.27,660) 404.64,644.64 cw(c420,629.27) v1@420,651
NetD1_1: D1.1 R1.2 | length 387.8
  Top Layer w10: D1.1@85,1336.81 cw(c85,1292.9) 116.05,1323.95 ; D1.1@85,1353.46 86.54,1353.46 120,1320 120,1250 165,1205 R1.2@186.54,1205 ; D1.1@99.68,1351.5 ccw(c126.68,1351.5) 107.59,1332.41 ; 129.79,1240.21 ccw(c179.69,1290.12) R1.2@183.73,1219.66 ; 145.56,1224.44 ccw(c181.4,1260.27) R1.2@184.3,1209.68 ; 161.34,1208.66 ccw(c183.11,1230.43) R1.2@184.87,1199.69
NetD2_1: D2.1 R2.2 | length 462.5
  Top Layer w10: D2.1@6.13,1367.13 ccw(c-7.42,1385) 15,1385 ; D2.1@15,1353.46 15,1385 ; D2.1@23.87,1367.13 cw(c37.42,1385) 15,1385 ; 148.28,1271.72 ccw(c161.94,1285.37) R2.2@174.79,1270.96 ; 155.77,1264.23 ccw(c169,1277.46) R2.2@181.45,1263.5 ; 163.26,1256.74 ccw(c176.06,1269.54) R2.2@188.1,1256.03 ; R2.2@171.63,1253.05 ccw(c160,1246.79) 160,1260 ; R2.2@171.63,1266.95 cw(c160,1273.21) 160,1260 ; R2.2@184.64,1260 R2.2@186.54,1260 160,1260 ; 15,1385 20,1390 110,1390 136,1364 136,1284 160,1260
NetD3_1: D3.1 R3.2 | length 449.7
  Top Layer w10: D3.1@-65.19,1366 ccw(c-88.34,1390) -55,1390 ; D3.1@-55,1353.46 -55,1390 ; D3.1@-44.81,1366 cw(c-21.66,1390) -55,1390 ; R3.2@178.02,1326.97 ccw(c166.29,1343.46) 186.54,1343.46 ; R3.2@186.54,1333.46 R3.2@186.54,1315 186.54,1343.46 ; R3.2@195.05,1326.97 cw(c206.78,1343.46) 186.54,1343.46 ; -55,1390 -39,1406 124,1406 186.54,1343.46
NetE1_1: E1.1 U1.43 | length 487.3
  Top Layer w14: U1.43@893.5,1008.5 940,1055 E1.1@940,1367 ; U1.43@908.81,1032.56 ccw(c908.81,1053.68) 923.74,1038.74 ccw(c938.68,1023.81) U1.43@917.56,1023.81 ; E1.1@920.81,1315.81 cw(c874.47,1269.47) 940,1269.47 ; E1.1@930.71,1325.71 cw(c908.27,1303.27) 940,1303.27
ONEWIRE: J2.35 U1.54 | length 1718.9
  Top Layer w6: U1.54@448.63,1220.63 480,1189.26 ; U1.54@466.95,1192.93 cw(c470.21,1179.48) 480,1189.26 ; v1@473.64,666.36 ccw(c458.27,681.73) 480,681.73 ccw(c501.73,681.73) v1@486.36,666.36 ; U1.54@476.33,1202.32 ccw(c489.79,1199.05) 480,1189.26 ; v1(480,660) 480,1130.74 480,1189.26
  Bottom Layer w6: J2.35@451.42,-255.4 ccw(c439.74,-243.72) 456.26,-243.72 ccw(c472.78,-243.72) J2.35@461.1,-255.4 ; J2.35@456.26,-321.26 456.26,-166.26 418,-128 418,598 v1(480,660) ; v1@471,660 cw(c449.27,660) 464.64,644.64 cw(c480,629.27) v1@480,651
P1.2: J2.10 R4.2 U1.30 | length 2317.2
  Top Layer w6: v1(790,1200) v1@790,1202.67 ; J2.10@860.93,-255.34 ccw(c849.87,-244) 865.71,-244 ; J2.10@865.71,-321.26 865.71,-244 ; J2.10@870.49,-255.34 cw(c881.55,-244) 865.71,-244 ; U1.30@1010.59,517.25 ccw(c999.96,527.89) 1015,527.89 ; 1015,534.13 cw(c1070.87,534.13) v1@1031.36,573.64 ; 1015,535.65 ccw(c1047.03,535.65) U1.30@1024.38,513.01 ; 1015,548.62 cw(c1056.38,548.62) v1@1027.12,577.88 ; 1015,550.14 ccw(c1061.51,550.14) U1.30@1028.62,517.25 ; 1015,563.1 cw(c1041.9,563.1) v1@1022.88,582.12 ; v1(1025,580) 1015,580 1015,512.84 U1.30@1034.92,492.92 1076,451.84 1076,325.09 904,153.09 904,-56.03 904,-146.43 904,-166.91 904,-179.94 904,-192.97 904,-205.71 865.71,-244 ; U1.30@1050.23,464.86 cw(c1050.23,434.09) 1071.99,455.85 cw(c1093.76,477.61) U1.30@1062.98,477.61 ; U1.30@1050.23,470.86 cw(c1050.23,454.57) 1061.75,466.09 cw(c1073.27,477.61) U1.30@1056.98,477.61
  Top Layer w10: R4.2@779.67,1244.56 cw(c757.96,1222.85) 788.66,1222.85 ; v1@785.05,1204.95 ccw(c776.33,1213.67) 788.66,1213.67 ; 788.66,1216.13 cw(c828.87,1216.13) R4.2@800.44,1244.56 ; 788.66,1220.13 ccw(c810.13,1220.13) v1@794.95,1204.95 ; R4.2@788.66,1256.34 788.66,1201.34 v1(790,1200)
  Bottom Layer w6: 765.51,1180.85 cw(c790,1156.36) v1@790,1191 ; 775.75,1191.1 cw(c790,1176.85) v1@790,1197 ; 778.42,1193.77 ccw(c772.18,1200) v1@781,1200 ; v1(790,1200) 784.65,1200 730,1145.35 730,920 1021,629 1021,586 1020,585 1030,585 v1(1025,580) ; v1@1018.64,586.36 ccw(c1012.93,592.07) 1021,592.07 ; 1021,596.9 ccw(c1041.9,596.9) v1@1027.12,582.12 ; 1021,611.38 ccw(c1056.38,611.38) v1@1031.36,586.36
P1.5: J2.8 U1.31 | length 1058.3
  Top Layer w6: J2.8@892.43,-255.34 ccw(c881.37,-244) 897.2,-244 ; J2.8@897.2,-321.26 897.2,-244 ; J2.8@901.98,-255.34 cw(c913.04,-244) 897.2,-244 ; U1.31@1070.28,528.28 1116,482.55 1116,348.12 916,148.12 916,-51.06 916,-151.41 916,-171.88 916,-184.91 916,-197.94 916,-210.68 916,-225.2 897.2,-244 ; U1.31@1085.59,500.22 cw(c1085.59,469.44) 1107.35,491.2 cw(c1129.11,512.97) U1.31@1098.34,512.97 ; U1.31@1085.59,506.22 cw(c1085.59,489.93) 1097.11,501.45 cw(c1108.63,512.97) U1.31@1092.34,512.97
P1.6: J2.6 U1.32 | length 1100.4
  Top Layer w6: J2.6@923.86,-255.4 ccw(c912.18,-243.72) 928.7,-243.72 ccw(c945.22,-243.72) J2.6@933.54,-255.4 ; J2.6@928.7,-321.26 928.7,-229.47 928,-228.77 928,-215.65 928,-202.91 928,-189.88 928,-176.85 928,-156.38 928,-46.09 928,143.15 1156,371.15 1156,513.26 U1.32@1105.63,563.63 ; U1.32@1120.94,535.57 cw(c1120.94,504.8) 1142.7,526.56 cw(c1164.47,548.32) U1.32@1133.69,548.32 ; U1.32@1120.94,541.57 cw(c1120.94,525.28) 1132.46,536.8 cw(c1143.98,548.32) U1.32@1127.69,548.32
P1.7: J2.4 U1.33 | length 1148.4
  Top Layer w6: J2.4@955.42,-255.34 ccw(c944.36,-244) 960.2,-244 ; J2.4@960.2,-321.26 960.2,-244 ; J2.4@964.98,-255.34 cw(c976.04,-244) 960.2,-244 ; U1.33@1140.99,598.99 1186,553.98 1186,384.18 940,138.18 940,-41.12 940,-161.35 940,-181.82 940,-194.85 940,-207.88 940,-220.62 940,-223.8 940.7,-224.5 960.2,-244 ; U1.33@1156.3,570.93 cw(c1156.3,540.15) 1178.06,561.92 cw(c1199.82,583.68) U1.33@1169.05,583.68 ; U1.33@1156.3,576.93 cw(c1156.3,560.64) 1167.82,572.16 cw(c1179.34,583.68) U1.33@1163.05,583.68